# Altium PCB PCB_O.pcbdoc
Units mil, origin at the board's own origin, x right, y up, seen from the top; angles counter-clockwise.
Board outline 3827.64 x 4141.73 mil, 2 copper layers (Top Layer, Bottom Layer); 2 components, 0 nets, 8 pads, 5 vias.
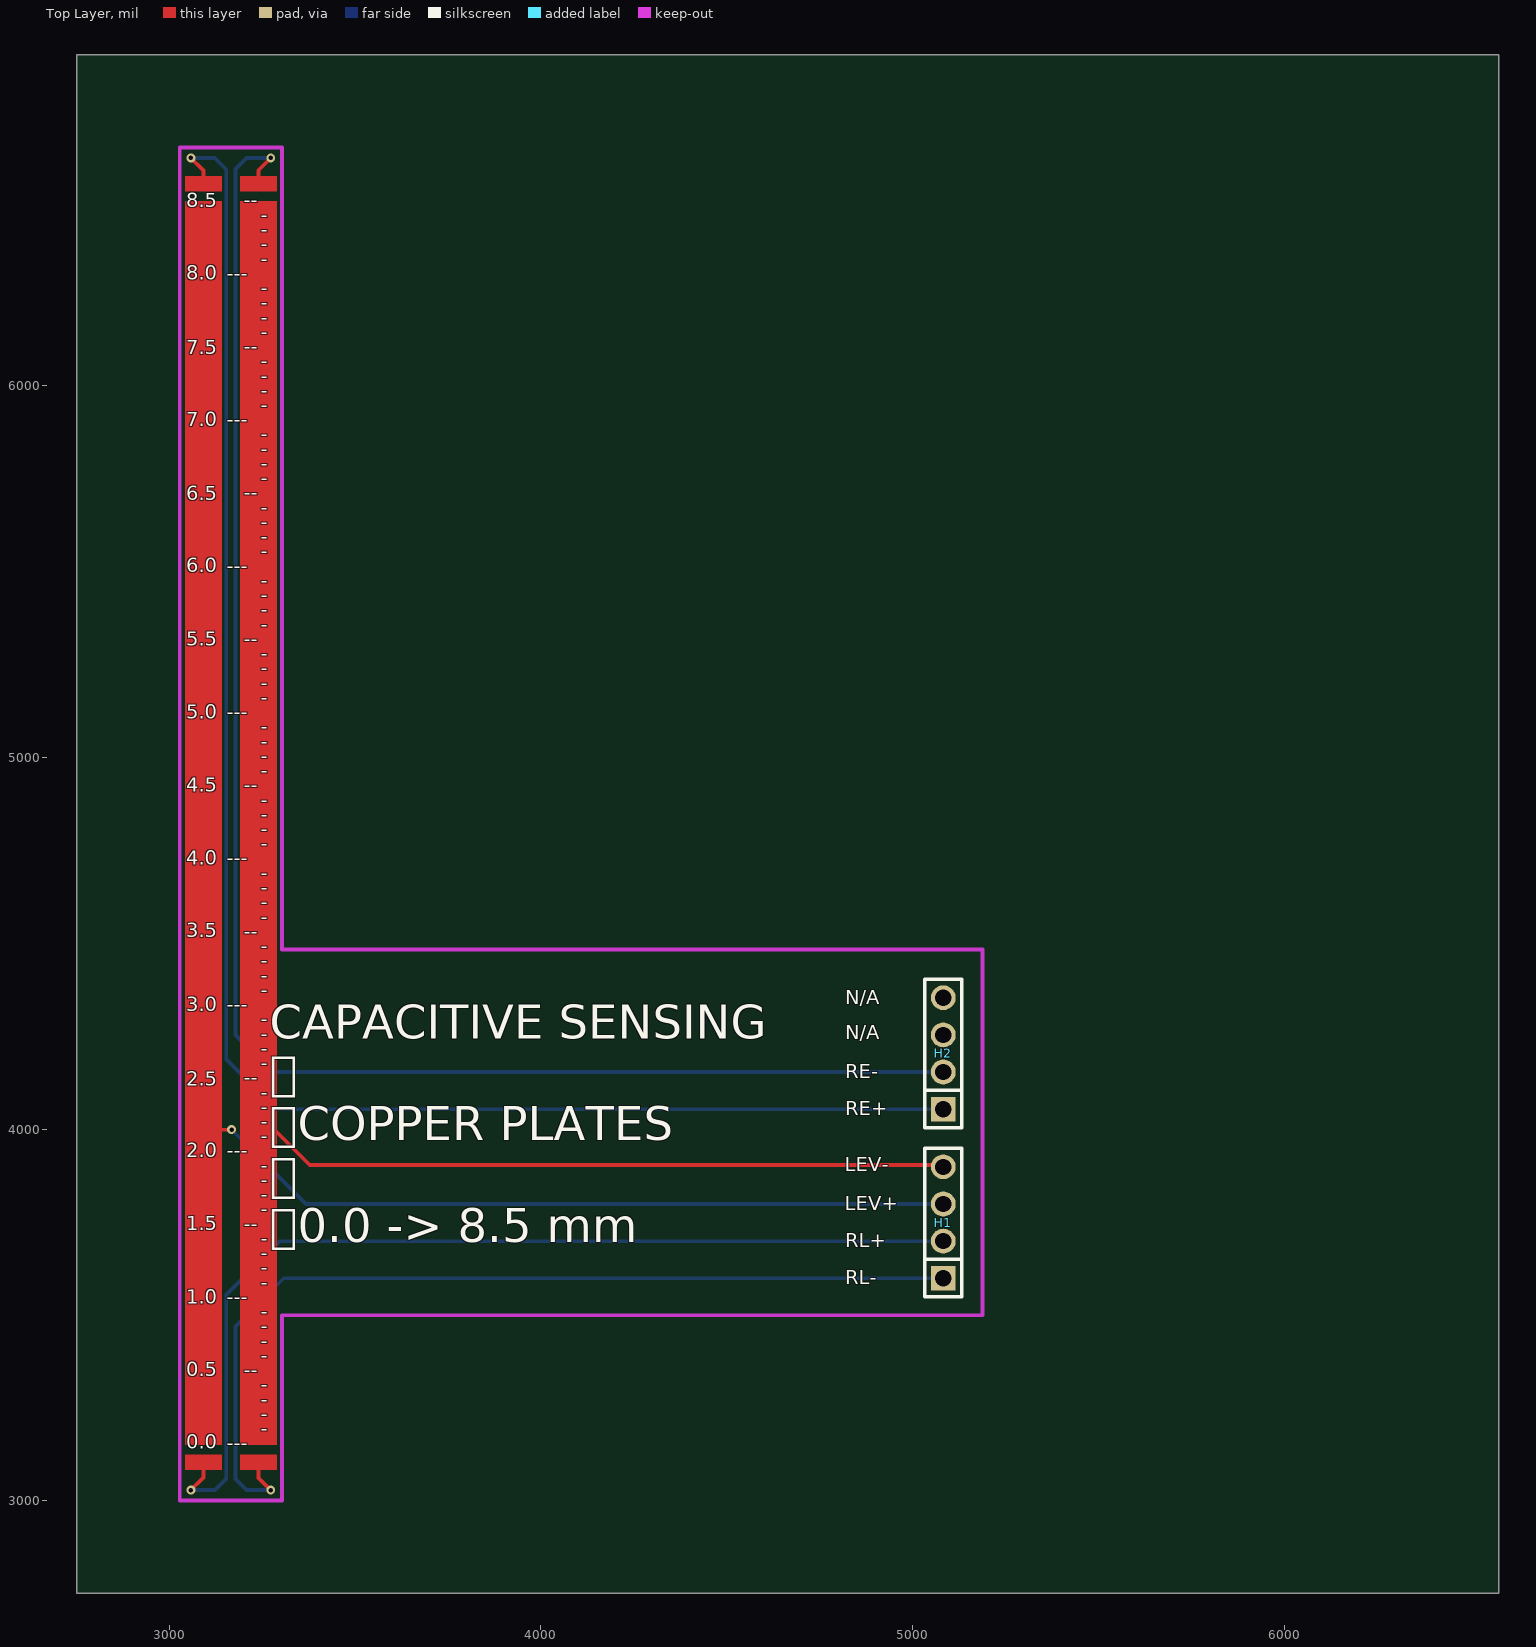
[diagram p0: Top Layer view]
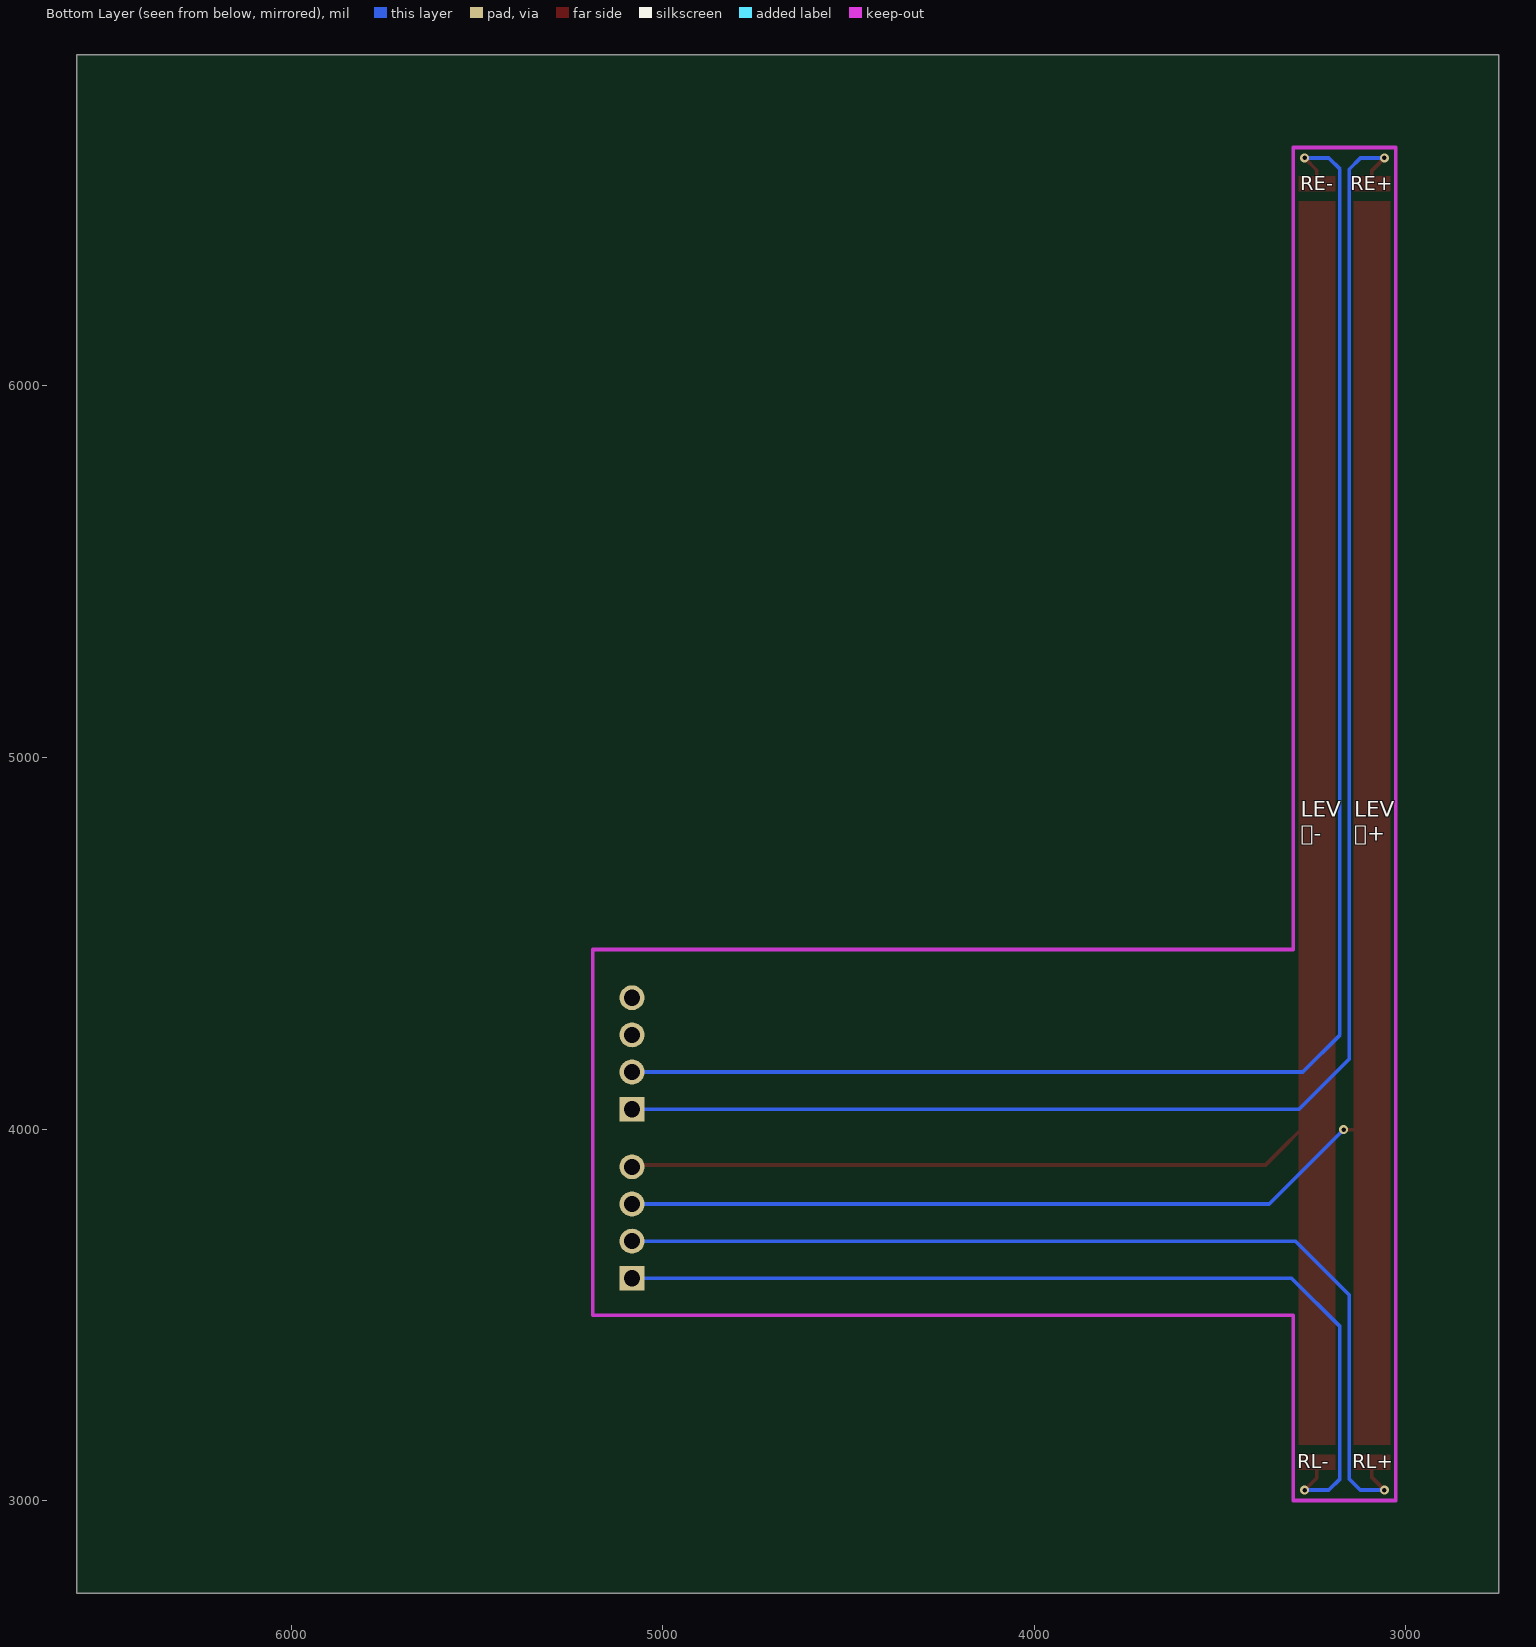
[diagram p1: Bottom Layer view, seen from below]

## Layer stack, top to bottom
Top Layer: signal copper (thickness not stored)
Dielectric: dielectric 12.6, FR-4, Dk 4.8
Bottom Layer: signal copper (thickness not stored)

## Board outline
6577.64,2750 2750,2750 2750,6891.73 6577.64,6891.73

## Components (designator, comment, footprint, x,y, rotation, side; value= is the part's Value field where it differs from the comment)
H1 "PH-00316" HDR-TH_4P-P2.54-V-M 5082.64,3748.31 r90 top
H2 "PH-00316" HDR-TH_4P-P2.54-V-M 5082.64,4203.31 r90 top

## Footprints (in the part's own frame and the unit in brackets; to place one, negate y for a bottom-side part, rotate by r counter-clockwise, add the part's x,y. Pads: shape width x height; smd on the part's side, far side on the other; paste and mask are expansions set on the pad)
HDR-TH_4P-P2.54-V-M [mm]
  rect 1.7x1.7 hole 1.1 paste+0 mask+0.051: 1(-3.81,0)
  round 1.7 hole 1.1 paste+0 mask+0.051: 2(-1.27,0) 3(1.27,0) 4(3.81,0)
  silkscreen extent -5.08,-1.27 5.08,1.27

## Via types
v1: diameter 24.02, hole 12.01, Top Layer to Bottom Layer, 5 vias

## Nets (pads, with @x,y where several pads share a name; then routed paths per layer and width w, separated by ;. In a path a pad name is that pad's centre, name@x,y a point inside that pad or via, vN(x,y) a via of type N, cw(c..) or ccw(c..) an arc to the next point about the centre after c; other vN are vias at no path point)
pads on no net: H1.1 H1.2 H1.3 H1.4 H2.1 H2.2 H2.3 H2.4
copper on no net: | length 19043.7
  Top Layer w10: v1(3057.64,3028.31) 3091.54,3062.2 3091.54,3103.31 ; v1(3057.64,6613.31) 3091.54,6579.41 3091.54,6543.94 ; 3091.54,3998.31 v1(3167.64,3998.31) ; 3239.65,3103.31 3239.65,3060.59 3271.92,3028.31 v1(3272.64,3028.31) ; 3239.65,4823.62 3239.65,4041.3 3377.64,3903.31 5077.64,3903.31 5082.64,3898.31 ; 3239.65,6543.94 3239.65,6580.31 v1(3272.64,6613.31)
  Bottom Layer w10: v1(3057.64,3028.31) 3122.64,3028.31 3152.64,3058.31 3152.64,3553.31 3297.64,3698.31 5082.64,3698.31 ; v1(3057.64,6613.31) 3122.12,6613.31 3152.64,6582.79 3152.64,4188.31 3287.64,4053.31 5082.64,4053.31 ; v1(3167.64,3998.31) 3367.64,3798.31 5082.64,3798.31 ; v1(3272.64,3028.31) 3207.64,3028.31 3177.64,3058.31 3177.64,3468.31 3307.64,3598.31 5082.64,3598.31 ; v1(3272.64,6613.31) 3207.64,6613.31 3177.64,6583.31 3177.64,4253.31 3277.64,4153.31 5082.64,4153.31

## Keep-outs
Board Outline Layer:
  lines w10: 3027.64,3000 3303.23,3000 3303.23,3498.7 5187.99,3498.7 5187.99,4482.95 3303.23,4482.95 3303.23,6641.73 3027.64,6641.73 3027.64,3000

## Other copper
Top Layer:
  region: 3042.32,6524.25 3140.75,6524.25 3140.75,6563.62 3042.32,6563.62
  region: 3190.43,6524.25 3288.86,6524.25 3288.86,6563.62 3190.43,6563.62
  region: 3042.32,3150.39 3140.75,3150.39 3140.75,6496.85 3042.32,6496.85
  region: 3042.32,3083.62 3140.75,3083.62 3140.75,3122.99 3042.32,3122.99
  region: 3190.43,3083.62 3288.86,3083.62 3288.86,3122.99 3190.43,3122.99
  region: 3190.43,3150.39 3288.86,3150.39 3288.86,6496.85 3190.43,6496.85

## Silkscreen, mask and mechanical layers (free items; w line width, h text height)
Top Silkscreen Layer:
  text "--" at 3200.45,6481.42 h38.33
  text "8.5" at 3044.66,6480.49 h38.33
  text "-" at 3246.44,6441.92 h38.61
  text "-" at 3246.44,6402.57 h38.61
  text "-" at 3246.44,6363.22 h38.61
  text "-" at 3246.44,6323.87 h38.61
  text "8.0" at 3044.66,6284.94 h38.33
  text "---" at 3154.37,6284.65 h38.33
  text "-" at 3246.44,6245.16 h38.61
  text "-" at 3246.44,6205.81 h38.61
  text "-" at 3246.44,6166.45 h38.61
  text "-" at 3246.44,6127.1 h38.61
  text "--" at 3200.45,6087.89 h38.33
  text "7.5" at 3044.66,6085.43 h38.33
  text "-" at 3246.44,6048.4 h38.61
  text "-" at 3246.44,6009.04 h38.61
  text "-" at 3246.44,5969.69 h38.61
  text "-" at 3246.44,5930.34 h38.61
  text "7.0" at 3044.66,5891.85 h38.33
  text "---" at 3154.37,5891.12 h38.33
  text "-" at 3246.44,5851.63 h38.61
  text "-" at 3246.44,5812.28 h38.61
  text "-" at 3246.44,5772.92 h38.61
  text "-" at 3246.44,5733.57 h38.61
  text "--" at 3200.45,5694.36 h38.33
  text "6.5" at 3044.66,5692.34 h38.33
  text "-" at 3246.44,5654.87 h38.61
  text "-" at 3246.44,5615.51 h38.61
  text "-" at 3246.44,5576.16 h38.61
  text "-" at 3246.44,5536.81 h38.61
  text "6.0" at 3044.66,5497.78 h38.33
  text "---" at 3154.37,5497.59 h38.33
  text "-" at 3246.44,5458.1 h38.61
  text "-" at 3246.44,5418.75 h38.61
  text "-" at 3246.44,5379.4 h38.61
  text "-" at 3246.44,5340.04 h38.61
  text "--" at 3200.45,5300.83 h38.33
  text "5.5" at 3044.66,5300.24 h38.33
  text "-" at 3246.44,5261.34 h38.61
  text "-" at 3246.44,5221.98 h38.61
  text "-" at 3246.44,5182.63 h38.61
  text "-" at 3246.44,5143.28 h38.61
  text "5.0" at 3044.66,5104.69 h38.33
  text "---" at 3154.37,5104.06 h38.33
  text "-" at 3246.44,5064.57 h38.61
  text "-" at 3246.44,5025.22 h38.61
  text "-" at 3246.44,4985.87 h38.61
  text "-" at 3246.44,4946.51 h38.61
  text "4.5" at 3044.66,4907.16 h38.33
  text "--" at 3200.45,4907.3 h38.33
  text "-" at 3246.44,4867.81 h38.61
  text "-" at 3246.44,4828.45 h38.61
  text "-" at 3246.44,4789.1 h38.61
  text "-" at 3246.44,4749.75 h38.61
  text "4.0" at 3044.66,4711.6 h38.33
  text "---" at 3154.37,4710.53 h38.33
  text "-" at 3246.44,4671.04 h38.61
  text "-" at 3246.44,4631.69 h38.61
  text "-" at 3246.44,4592.34 h38.61
  text "-" at 3246.44,4552.98 h38.61
  text "3.5" at 3044.66,4516.05 h38.33
  text "--" at 3200.45,4513.77 h38.33
  text "-" at 3246.44,4474.28 h38.61
  text "-" at 3246.44,4434.92 h38.61
  text "-" at 3246.44,4395.57 h38.61
  text "-" at 3246.44,4356.22 h38.61
  text "N/A" at 4819.37,4336.42 h38.33
  text "3.0" at 3044.66,4316.54 h38.33
  text "---" at 3154.37,4317.01 h38.33
  text "-" at 3246.44,4277.51 h38.61
  text "N/A" at 4819.37,4241.42 h38.33
  text "-" at 3246.44,4238.16 h38.61
  text "-" at 3246.44,4198.81 h38.61
  text "-" at 3246.44,4159.45 h38.61
  text "RE-" at 4819.37,4136.42 h38.33
  text "--" at 3200.45,4120.24 h38.33
  text "2.5" at 3044.66,4117.03 h38.33
  text "-" at 3246.44,4080.75 h38.61
  text "-" at 3246.44,4041.4 h38.61
  text "RE+" at 4819.37,4036.89 h38.33
  text "-" at 3246.44,4002.04 h38.61
  text "-" at 3246.44,3962.69 h38.61
  text "2.0" at 3044.66,3923.45 h38.33
  text "---" at 3154.37,3923.48 h38.33
  text "LEV-" at 4817.68,3886.42 h38.33
  text "-" at 3246.44,3883.98 h38.61
  text "-" at 3246.44,3844.63 h38.61
  text "-" at 3246.44,3805.28 h38.61
  text "LEV+" at 4817.68,3781.89 h38.33
  text "-" at 3246.44,3765.92 h38.61
  text "1.5" at 3044.66,3727.9 h38.33
  text "--" at 3200.45,3726.71 h38.33
  text "CAPACITIVE SENSING /   /  COPPER PLATES /   /  0.0 -> 8.5 mm" at 3270.08,3694.95 h91.42
  text "-" at 3246.44,3687.22 h38.61
  text "RL+" at 4819.37,3681.42 h38.33
  text "-" at 3246.44,3647.87 h38.61
  text "-" at 3246.44,3608.51 h38.61
  text "RL-" at 4819.37,3581.89 h38.33
  text "-" at 3246.44,3569.16 h38.61
  text "1.0" at 3044.66,3530.37 h38.33
  text "---" at 3154.37,3529.95 h38.33
  text "-" at 3246.44,3490.45 h38.61
  text "-" at 3246.44,3451.1 h38.61
  text "-" at 3246.44,3411.75 h38.61
  text "-" at 3246.44,3372.4 h38.61
  text "0.5" at 3044.66,3334.81 h38.33
  text "--" at 3200.45,3333.18 h38.33
  text "-" at 3246.44,3293.69 h38.61
  text "-" at 3246.44,3254.34 h38.61
  text "-" at 3246.44,3214.98 h38.61
  text "-" at 3246.44,3175.63 h38.61
  text "0.0" at 3044.66,3139.26 h38.33
  text "---" at 3154.37,3136.42 h38.33
Bottom Silkscreen Layer:
  text "RE+" at 3149.37,6526.42 h38.33
  text "RE-" at 3284.37,6526.42 h38.33
  text "LEV /  +" at 3138.49,4776.42 h42.73
  text "LEV /  -" at 3283.49,4776.42 h42.73
  text "RL+" at 3143.81,3086.89 h38.33
  text "RL-" at 3291.92,3086.89 h38.33